# Altium PCB Tigershark 3D R1.5.PcbDoc (part 3 of 4)
Units mil, origin at the board's own origin, x right, y up, seen from the top; angles counter-clockwise.
Board outline 5500 x 4600 mil, 4 copper layers (Top Layer, Groun Plane, Power Plane, Bottom Layer); 333 components, 260 nets, 1066 pads, 887 vias.
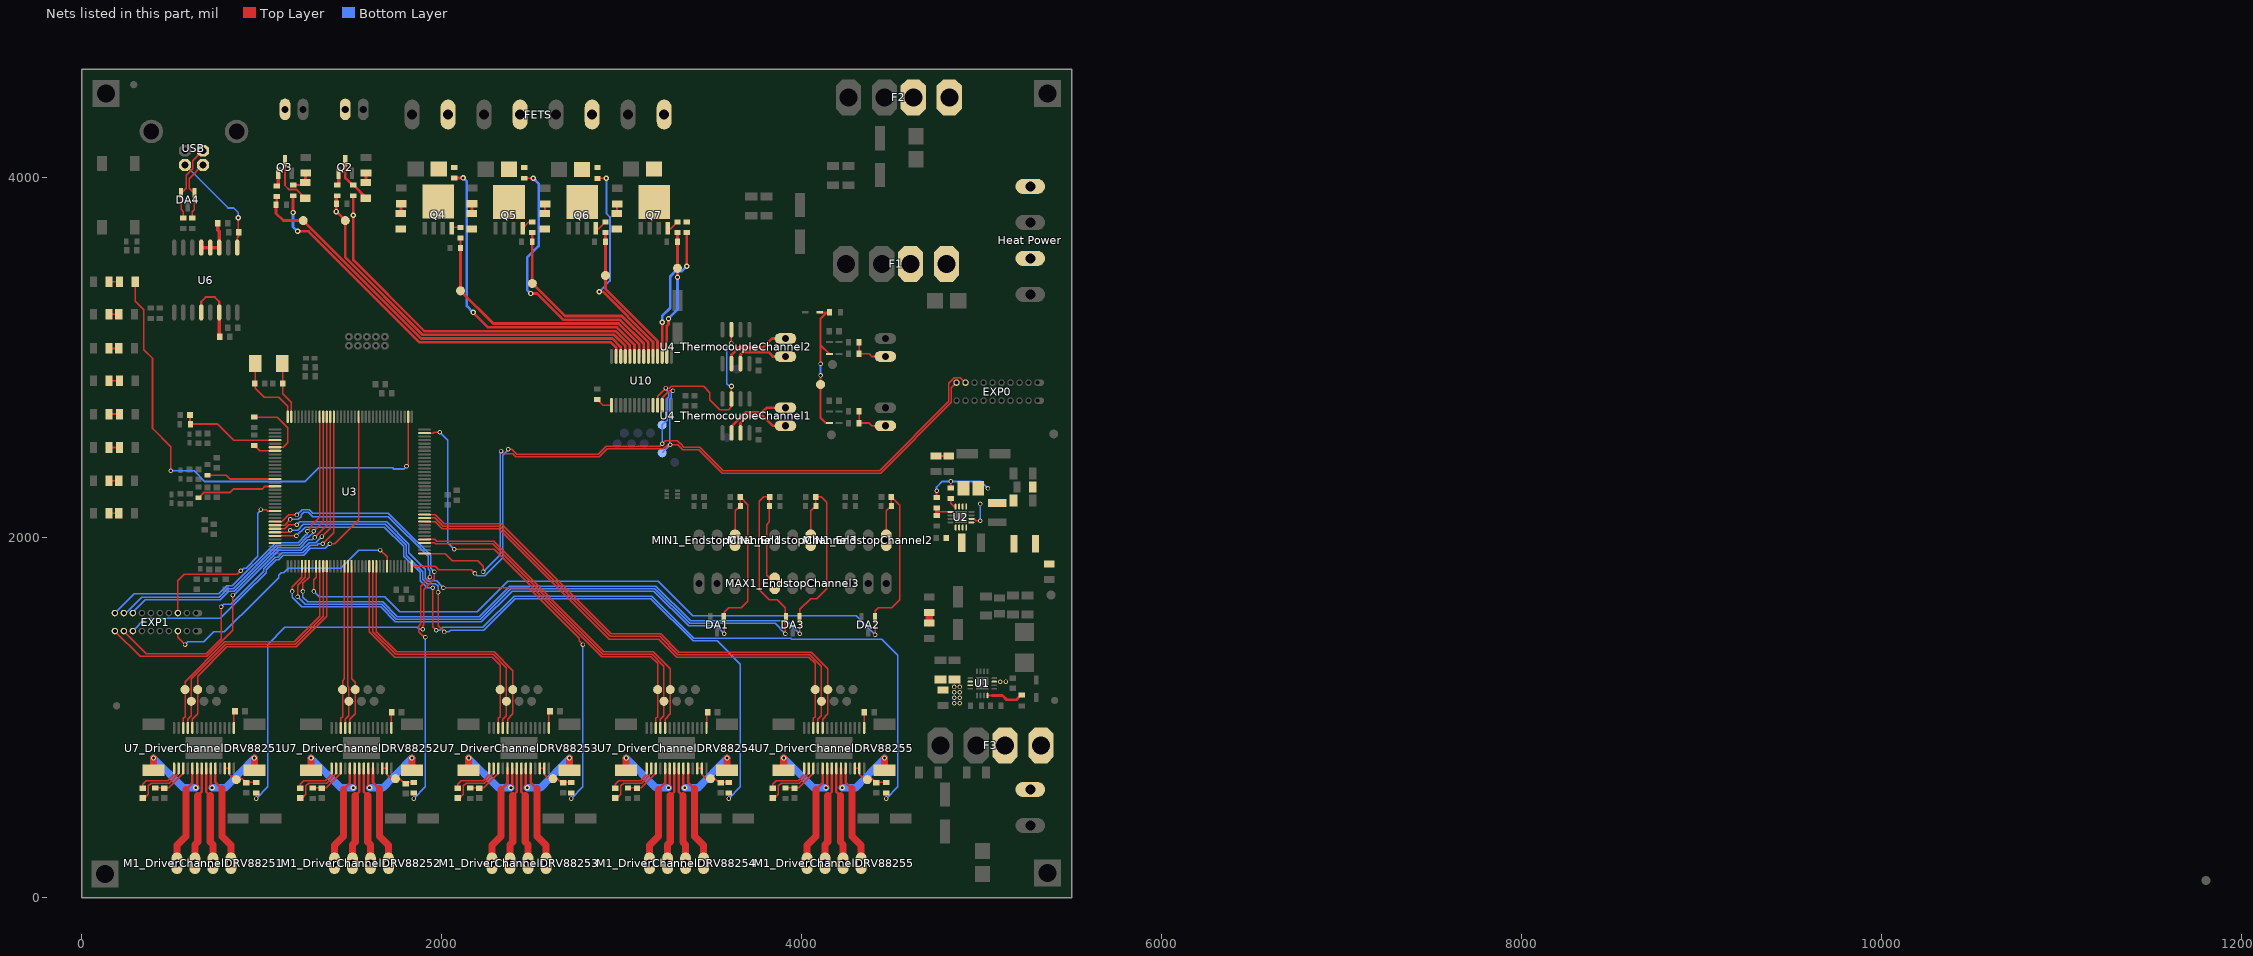
[diagram p5: the nets of this part, all layers, seen from the top]

## Via types
v1: diameter 25, hole 15, Top Layer to Bottom Layer, tented both sides, 435 vias
v2: diameter 30, hole 15, Top Layer to Bottom Layer, tented both sides, 344 vias
v3: diameter 19.68, hole 7.87, Top Layer to Bottom Layer, tented both sides, 75 vias
v4: diameter 50, hole 28, Top Layer to Bottom Layer, tented both sides, 13 vias
v5: diameter 50, hole 20, Top Layer to Bottom Layer, tented both sides, 9 vias
v6: diameter 25, hole 15, Top Layer to Bottom Layer, tented bottom, 8 vias
v7: diameter 30, hole 20, Top Layer to Bottom Layer, tented both sides, 3 vias

## Nets (pads, with @x,y where several pads share a name; then routed paths per layer and width w, separated by ;. In a path a pad name is that pad's centre, name@x,y a point inside that pad or via, vN(x,y) a via of type N, cw(c..) or ccw(c..) an arc to the next point about the centre after c; other vN are vias at no path point) (continued)
MAX_ES3: C2_EndstopChannel3.1 DA3.2 MAX1_EndstopChannel3.1 R3_EndstopChannel3.2 U3.78 | length 4520.1
  Top Layer w8: v1(1200,1670) 1200,1735.4 1243.94,1779.34 U3.78@1243.94,1839.65 ; MAX1_EndstopChannel3.1@3850,1745 3805,1790 3805,2070 3820.94,2085.95 R3_EndstopChannel3.2@3820.94,2175 3820.94,2223.5 C2_EndstopChannel3.1@3822.44,2225 3790,2225 3765,2200 3765,1710 3820,1655 3865,1655 3910,1610 DA3.2@3910,1552.4 ; v1(3910,1465) 3910,1549.8 DA3.2@3912.6,1552.4
  Bottom Layer w8: v1(1200,1670) 1242,1628 1666.6,1628 1749.04,1545.56 2214.75,1545.56 2385.2,1716 3184.6,1716 3377.6,1523 3852,1523 v1(3910,1465)
MIN_ES1: C1_EndstopChannel1.1 DA1.1 MIN1_EndstopChannel1.1 R2_EndstopChannel1.2 U3.77 | length 3940.5
  Top Layer w8: v1(1170,1700) 1170,1725.2 1224.25,1779.45 U3.77@1224.25,1839.65 ; v1(3570,1465) DA1.1@3570,1549.8 ; DA1.1@3570,1552.4 3570,1585 3595,1610 3665,1610 3700,1645 3700,2183.03 C1_EndstopChannel1.1@3658.03,2225 3658.03,2176.97 3630,2148.94 MIN1_EndstopChannel1.1@3630,1985
  Bottom Layer w8: v1(1170,1700) 1170,1668.18 1224.18,1614 1660.8,1614 1743.24,1531.56 2220.55,1531.56 2390.99,1702 3178.8,1702 3371.8,1509 3526,1509 v1(3570,1465)
MIN_ES2: C1_EndstopChannel2.1 DA2.1 MIN1_EndstopChannel2.1 R2_EndstopChannel2.2 U3.81 | length 4640
  Top Layer w8: v1(1290,1700) 1290,1765 1302.99,1777.99 U3.81@1302.99,1839.65 ; v1(4407.4,1460) DA2.1@4407.4,1552.4 4407.4,1592.4 4425,1610 4500,1610 4545,1655 4545,2178.03 C1_EndstopChannel2.1@4498.03,2225 4498.03,2176.97 4470,2148.94 MIN1_EndstopChannel2.1@4470,1985
  Bottom Layer w8: v1(1290,1700) 1320,1670 1683.99,1670 1766.44,1587.56 2197.36,1587.56 2367.8,1758 3202,1758 3395,1565 4302.4,1565 v1(4407.4,1460)
MIN_ES3: C1_EndstopChannel3.1 DA3.1 MIN1_EndstopChannel3.1 R2_EndstopChannel3.2 U3.79 | length 4309.4
  Top Layer w8: v1(1230,1700) 1230,1745.6 1263.62,1779.23 U3.79@1263.62,1839.65 ; v1(3990,1465) 3990,1600 4050,1660 4085,1660 4140,1715 4140,2195 4110,2225 C1_EndstopChannel3.1@4078.03,2225 4078.03,2176.97 4050,2148.94 MIN1_EndstopChannel3.1@4050,1985
  Bottom Layer w8: v1(1230,1700) 1230,1668.18 1256.18,1642 1672.4,1642 1754.84,1559.56 2208.96,1559.56 2379.4,1730 3190.4,1730 3383.4,1537 3918,1537 v1(3990,1465)
MISO: EXP0.19 TP7.1 U3.108 U4_ThermocoupleChannel1.7 U4_ThermocoupleChannel2.7 U10.11 | length 5475.5
  Top Layer w8: U3.108@1834.49,1839.65 1965.35,1839.65 1985,1820 2165,1820 v1(2185,1800) ; v1(2370,2490) 2390.2,2490 2418.2,2462 2870.59,2462 2915.59,2507 3212,2507 3242.5,2537.5 3308.92,2537.5 3335.5,2510.92 3335.5,2510.71 3345.21,2501 3435.21,2501 3565.21,2371 4432.41,2371 4818,2756.59 4818,2857.6 4848.4,2888 4882,2888 EXP0.19@4910,2860 ; U10.11@3199.57,2734.17 3199.57,2784.57 v1(3245,2830) 3265,2830 3275,2840 3455,2840 3490,2805 3490,2764.49 3545,2709.49 3594.49,2709.49 3610,2725 U4_ThermocoupleChannel1.7@3610,2769.49 v2(3610,2840) ; v1(3610,3080) U4_ThermocoupleChannel2.7@3610,3154.49
  Bottom Layer w8: v1(2185,1800) 2197.5,1787.5 2239.32,1787.5 2339,1887.18 2339,2457.18 2370,2488.18 v1(2370,2490) ; v1(3225,2520) TP7.1@3225,2624.8 3252,2651.8 3252,2772.22 3261,2781.22 3261,2807.18 3245,2823.18 v1(3245,2830) ; v2(3610,2840) 3600,2840 3585,2855 3585,3055 v1(3610,3080)
MOD0E1: TP37_DriverChannelDRV88251.1 U3.84 U7_DriverChannelDRV88251.24 | length 1432
  Top Layer w8: U7_DriverChannelDRV88251.24@616.02,942.2 616.02,991.02 645,1020 TP37_DriverChannelDRV88251.1@645,1155 645,1229.2 807.8,1392 1192.8,1392 1362.05,1561.24 U3.84@1362.05,1839.65
MOD0E2: TP37_DriverChannelDRV88252.1 U3.91 U7_DriverChannelDRV88252.24 | length 917.8
  Top Layer w8: U7_DriverChannelDRV88252.24@1491.02,942.2 1491.02,991.02 1520,1020 TP37_DriverChannelDRV88252.1@1520,1155 1520,1195 1499.84,1215.16 U3.91@1499.84,1839.65
MOD0E3: TP37_DriverChannelDRV88253.1 U3.98 U7_DriverChannelDRV88253.24 | length 1540.2
  Top Layer w8: U3.98@1637.64,1839.65 1637.64,1641.96 1638,1641.6 1638,1476.6 1750.6,1364 2291.8,1364 2395,1260.8 TP37_DriverChannelDRV88253.1@2395,1155 2395,1020 2366.02,991.02 U7_DriverChannelDRV88253.24@2366.02,942.2
MOD0E4: TP37_DriverChannelDRV88254.1 U3.113 U7_DriverChannelDRV88254.24 | length 2002.7
  Top Layer w8: U3.113@1905.35,1989.25 1960.75,1989.25 1972.12,1977.88 2289.33,1977.88 2901.21,1366 3174.6,1366 3270,1270.6 TP37_DriverChannelDRV88254.1@3270,1155 3270,1020 3241.02,991.02 U7_DriverChannelDRV88254.24@3241.02,942.2
MOD0E5: TP37_DriverChannelDRV88255.1 U3.120 U7_DriverChannelDRV88255.24 | length 2934.9
  Top Layer w8: U3.120@1905.35,2127.05 1963.56,2127.05 2014.72,2075.88 2329.92,2075.88 2941.8,1464 3216.6,1464 3317.6,1363 4052.8,1363 4145,1270.8 TP37_DriverChannelDRV88255.1@4145,1155 4145,1020 4116.02,991.02 U7_DriverChannelDRV88255.24@4116.02,942.2
MOD1E1: TP36_DriverChannelDRV88251.1 U3.83 U7_DriverChannelDRV88251.25 | length 1434.4
  Top Layer w8: U7_DriverChannelDRV88251.25@590.43,942.2 590.43,990.43 610,1010 TP36_DriverChannelDRV88251.1@610,1090 610,1213.99 802.01,1406 1187.01,1406 1342.36,1561.36 U3.83@1342.36,1839.65
MOD1E2: TP36_DriverChannelDRV88252.1 U3.90 U7_DriverChannelDRV88252.25 | length 907.7
  Top Layer w8: U7_DriverChannelDRV88252.25@1465.43,942.2 1465.43,990.43 1485,1010 TP36_DriverChannelDRV88252.1@1485,1090 1485,1169.5 1480,1174.5 1480,1839.49 U3.90@1480.16,1839.65
MOD1E3: TP36_DriverChannelDRV88253.1 U3.97 U7_DriverChannelDRV88253.25 | length 1529.9
  Top Layer w8: U3.97@1617.95,1839.65 1617.95,1476.85 1744.8,1350 2286.01,1350 2360,1276.01 TP36_DriverChannelDRV88253.1@2360,1090 2360,1010 2340.43,990.43 U7_DriverChannelDRV88253.25@2340.43,942.2
MOD1E4: TP36_DriverChannelDRV88254.1 U3.112 U7_DriverChannelDRV88254.25 | length 1964.6
  Top Layer w8: U3.112@1905.35,1969.57 1960.43,1969.57 1966.12,1963.88 2283.53,1963.88 2895.41,1352 3168.8,1352 3235,1285.8 TP36_DriverChannelDRV88254.1@3235,1090 3235,1010 3215.43,990.43 U7_DriverChannelDRV88254.25@3215.43,942.2
MOD1E5: TP36_DriverChannelDRV88255.1 U3.119 U7_DriverChannelDRV88255.25 | length 2898.4
  Top Layer w8: U3.119@1905.35,2107.36 1907.99,2110 1960.8,2110 2008.92,2061.88 2324.12,2061.88 2936.01,1450 3210.8,1450 3311.8,1349 4046,1349 4110,1285 TP36_DriverChannelDRV88255.1@4110,1090 4110,1010 4090.43,990.43 U7_DriverChannelDRV88255.25@4090.43,942.2
MOD2E1: TP35_DriverChannelDRV88251.1 U3.82 U7_DriverChannelDRV88251.26 | length 1436.9
  Top Layer w8: U7_DriverChannelDRV88251.26@564.84,942.2 564.84,994.84 575,1005 TP35_DriverChannelDRV88251.1@575,1155 575,1198.79 796.21,1420 1181.21,1420 1322.68,1561.47 U3.82@1322.68,1839.65
MOD2E2: TP35_DriverChannelDRV88252.1 U3.89 U7_DriverChannelDRV88252.26 | length 906
  Top Layer w8: U7_DriverChannelDRV88252.26@1439.84,942.2 1439.84,994.84 1450,1005 TP35_DriverChannelDRV88252.1@1450,1155 1450,1205 1460.47,1215.47 U3.89@1460.47,1839.65
MOD2E3: TP35_DriverChannelDRV88253.1 U3.96 U7_DriverChannelDRV88253.26 | length 1519.7
  Top Layer w8: U3.96@1598.27,1839.65 1598.27,1476.73 1739,1336 2280.21,1336 2325,1291.21 TP35_DriverChannelDRV88253.1@2325,1155 2325,1005 2314.84,994.84 U7_DriverChannelDRV88253.26@2314.84,942.2
MOD2E4: TP35_DriverChannelDRV88254.1 U3.143 U7_DriverChannelDRV88254.26 | length 2525.6
  Top Layer w8: U3.143@1905.35,2579.8 1954.8,2579.8 1960,2585 v1(1990,2585) ; v1(2070,1935) 2292.61,1935 2889.61,1338 3163.01,1338 3200,1301.01 TP35_DriverChannelDRV88254.1@3200,1155 3200,1005 3189.84,994.84 U7_DriverChannelDRV88254.26@3189.84,942.2
  Bottom Layer w8: v1(1990,2585) 2035,2540 2035,1970 v1(2070,1935)
MOD2E5: TP35_DriverChannelDRV88255.1 U3.118 U7_DriverChannelDRV88255.26 | length 2858
  Top Layer w8: U3.118@1905.35,2087.68 1963.33,2087.68 2003.12,2047.88 2318.32,2047.88 2930.21,1436 3205.01,1436 3306.01,1335 4040.2,1335 4075,1300.2 TP35_DriverChannelDRV88255.1@4075,1155 4075,1005 4064.84,994.84 U7_DriverChannelDRV88255.26@4064.84,942.2
MODE0_EXP1: EXP1.1 U3.24 | length 2283.5
  Top Layer w8: EXP1.1@185,1480 325,1340 696.41,1340 840,1483.59 v1(840,1680) ; v1(1335,2005) 1381.73,2051.73 U3.24@1381.73,2670.35
  Bottom Layer w8: v1(840,1680) 846.61,1680 878,1711.39 878,1711.95 1096.05,1930 1221.61,1930 1263.61,1972 1302,1972 v1(1335,2005)
MODE0_EXP2: EXP1.20 U3.27 | length 1933.6
  Top Layer w8: v1(1255,2035) 1280,2060 1280,2070 1322.68,2112.68 U3.27@1322.68,2670.35
  Bottom Layer w8: EXP1.20@185,1580 292.44,1687.44 762.44,1687.44 805.5,1730.5 837.16,1730.5 1078.66,1972 1204.21,1972 1246.21,2014 1254,2014 1255,2015 v1(1255,2035)
MODE1_EXP1: EXP1.2 U3.23 | length 2252
  Top Layer w8: EXP1.2@235,1480 360,1355 691.61,1355 775,1438.39 v1(775,1615) ; v1(1340,1965) 1401.42,2026.42 U3.23@1401.42,2670.35
  Bottom Layer w8: v1(775,1615) 790,1630 830,1630 1011,1811 1011,1825.15 1074.85,1889 1089,1889 1116,1916 1227.41,1916 1269.41,1958 1308,1958 1315,1965 v1(1340,1965)
MODE1_EXP2: EXP1.19 U3.26 | length 1903.4
  Top Layer w8: v1(1290,2035) 1342.36,2087.36 U3.26@1342.36,2670.35
  Bottom Layer w8: EXP1.19@235,1580 245.4,1580 334.4,1669 763.8,1669 811.3,1716.5 842.95,1716.5 1084.45,1958 1210.01,1958 1252.01,2000 1260,2000 1290,2030 v1(1290,2035)
MODE2_EXP1: EXP1.3 U3.16 | length 2090.4
  Top Layer w8: v1(1380,1965) 1405.2,1965 1539.21,2099.01 U3.16@1539.21,2670.35
  Bottom Layer w8: EXP1.3@285,1480 355,1550 770,1550 906,1686 906,1686.2 1025,1805.2 1025,1819.35 1080.65,1875 1094.8,1875 1121.8,1902 1233.21,1902 1271.21,1940 1355,1940 v1(1380,1965)
MODE2_EXP2: EXP1.18 U3.25 | length 1885.4
  Top Layer w8: v1(1295,2000) 1362.05,2067.05 U3.25@1362.05,2670.35
  Bottom Layer w8: EXP1.18@285,1580 285,1585 355,1655 769.6,1655 817.1,1702.5 849.31,1702.5 864,1717.19 864,1717.75 1090.25,1944 1215.81,1944 1257.81,1986 1281,1986 v1(1295,2000)
MOSI: EXP0.20 TP8.1 U3.109 U10.12 | length 4481.2
  Top Layer w8: U3.109@1905.35,1910.51 2019.49,1910.51 2060,1870 2200,1870 2230,1840 v1(2230,1810) ; v1(2330,2480) 2345,2465 2395.4,2465 2412.4,2448 2876.39,2448 2920.32,2491.93 3232.34,2491.93 3255.41,2515 v1(3270,2515) 3311.62,2515 3321.5,2505.12 3321.5,2504.91 3339.41,2487 3429.41,2487 3559.41,2357 4438.21,2357 4832,2750.79 4832,2832 EXP0.20@4860,2860 ; U10.12@3225.16,2734.17 3225.16,2775.16 3265,2815 v1(3285,2815)
  Bottom Layer w8: v1(2230,1810) 2325,1905 2325,2480 v1(2330,2480) ; TP8.1@3225,2470 v1(3270,2515) 3266,2519 3266,2766.42 3275,2775.42 3275,2805 v1(3285,2815)
NetC4_1: C4.1 C52.1 FB3.1 L2.2 R12.2 R37.2 U2.14 | length 554.1
  Top Layer w10: R37.2@4749.55,2222.71 v1(4749.55,2259.18) ; R12.2@4828.55,2274.71 v1(4828.55,2311.18) ; U2.14@4942.62,2103.34 4957.51,2103.34 4967.67,2093.18 v1(4991.55,2093.18)
  Bottom Layer w10: v1(4749.55,2259.18) 4749.55,2280.18 4780.55,2311.18 v1(4828.55,2311.18) 4995.55,2311.18 v1(5034.55,2272.18) ; v1(4991.55,2093.18) v1(4991.55,2186.18)
NetC10_2: C10.2 C11.2 R24.1 U1.2 U1.3 U1.11
  other v1: 4848.07,1079.53 4878.07,1079.53 4848.07,1109.53 4878.07,1109.53 4848.07,1139.53 4878.07,1139.53 4848.07,1169.53 4878.07,1169.53 5103.07,1199.37 5133.07,1199.53
NetC22_1: C22.1 F4.1 U2.10 U2.11 U2.12 U2.13
NetC24_2: C24.2 U2.9
NetC43_2: C43.2 U3.36 X2.1 | length 416.3
  Top Layer w8: X2.1@965,2965 965,2830 1015,2780 1095,2780 1145.51,2729.49 U3.36@1145.51,2670.35
NetC44_2: C44.2 U3.35 X2.2 | length 315.6
  Top Layer w8: X2.2@1114.61,2965 1117.56,2962.05 C44.2@1117.56,2855 1117.56,2797.44 1165.2,2749.8 U3.35@1165.2,2670.35
NetC56_2: C56.2 U6.12 U6.14 | length 373.4
  Top Layer w12: U6.12@665,3249.88 665,3310 690,3335 740,3335 765,3310 U6.14@765,3249.88
  Top Layer w22: C56.2@765,3117.44 U6.14@765,3249.88
NetC58_2: C58.2 U6.1 USB.1 | length 599.8
  Top Layer w10: U6.1@865,3610.12 865,3665 872.56,3672.56 C58.2@872.56,3695 ; C58.2@870,3697.56 v2(870,3775)
  Bottom Layer w10: USB.1@575,4069 814,3830 845,3830 870,3805 v2(870,3775)
NetC59_2: C59.2 U6.3 U6.4 U6.5 | length 238
  Top Layer w20: U6.5@665,3610.12 U6.4@715,3610.12 U6.3@765,3610.12 765,3700 757.44,3707.56 C59.2@757.44,3745
NetC66_DriverChannelDRV88251_2: C66_DriverChannelDRV88251.2 R30_DriverChannelDRV88251.2 U7_DriverChannelDRV88251.3 | length 216.1
  Top Layer w8: R30_DriverChannelDRV88251.2@410,609.53 484.53,609.53 564.84,689.84 U7_DriverChannelDRV88251.3@564.84,717.8
NetC66_DriverChannelDRV88252_2: C66_DriverChannelDRV88252.2 R30_DriverChannelDRV88252.2 U7_DriverChannelDRV88252.3 | length 216.1
  Top Layer w8: R30_DriverChannelDRV88252.2@1285,609.53 1359.53,609.53 1439.84,689.84 U7_DriverChannelDRV88252.3@1439.84,717.8
NetC66_DriverChannelDRV88253_2: C66_DriverChannelDRV88253.2 R30_DriverChannelDRV88253.2 U7_DriverChannelDRV88253.3 | length 216.1
  Top Layer w8: R30_DriverChannelDRV88253.2@2160,609.53 2234.53,609.53 2314.84,689.84 U7_DriverChannelDRV88253.3@2314.84,717.8
NetC66_DriverChannelDRV88254_2: C66_DriverChannelDRV88254.2 R30_DriverChannelDRV88254.2 U7_DriverChannelDRV88254.3 | length 216.1
  Top Layer w8: R30_DriverChannelDRV88254.2@3035,609.53 3109.53,609.53 3189.84,689.84 U7_DriverChannelDRV88254.3@3189.84,717.8
NetC66_DriverChannelDRV88255_2: C66_DriverChannelDRV88255.2 R30_DriverChannelDRV88255.2 U7_DriverChannelDRV88255.3 | length 216.1
  Top Layer w8: R30_DriverChannelDRV88255.2@3910,609.53 3984.53,609.53 4064.84,689.84 U7_DriverChannelDRV88255.3@4064.84,717.8
NetC68_DriverChannelDRV88251_1: C68_DriverChannelDRV88251.1 U7_DriverChannelDRV88251.1 | length 256.6
  Top Layer w8: C68_DriverChannelDRV88251.1@350,607.56 340,617.56 340,630 360,650 480,650 513.66,683.66 U7_DriverChannelDRV88251.1@513.66,717.8
NetC68_DriverChannelDRV88251_2: C68_DriverChannelDRV88251.2 U7_DriverChannelDRV88251.2 | length 302.3
  Top Layer w8: C68_DriverChannelDRV88251.2@350,552.44 370,572.44 370,620 386,636 486,636 539.25,689.25 U7_DriverChannelDRV88251.2@539.25,717.8
NetC68_DriverChannelDRV88252_1: C68_DriverChannelDRV88252.1 U7_DriverChannelDRV88252.1 | length 256.6
  Top Layer w8: C68_DriverChannelDRV88252.1@1225,607.56 1215,617.56 1215,630 1235,650 1355,650 1388.66,683.66 U7_DriverChannelDRV88252.1@1388.66,717.8
NetC68_DriverChannelDRV88252_2: C68_DriverChannelDRV88252.2 U7_DriverChannelDRV88252.2 | length 302.3
  Top Layer w8: C68_DriverChannelDRV88252.2@1225,552.44 1245,572.44 1245,620 1261,636 1361,636 1414.25,689.25 U7_DriverChannelDRV88252.2@1414.25,717.8
NetC68_DriverChannelDRV88253_1: C68_DriverChannelDRV88253.1 U7_DriverChannelDRV88253.1 | length 256.6
  Top Layer w8: C68_DriverChannelDRV88253.1@2100,607.56 2090,617.56 2090,630 2110,650 2230,650 2263.66,683.66 U7_DriverChannelDRV88253.1@2263.66,717.8
NetC68_DriverChannelDRV88253_2: C68_DriverChannelDRV88253.2 U7_DriverChannelDRV88253.2 | length 302.3
  Top Layer w8: C68_DriverChannelDRV88253.2@2100,552.44 2120,572.44 2120,620 2136,636 2236,636 2289.25,689.25 U7_DriverChannelDRV88253.2@2289.25,717.8
NetC68_DriverChannelDRV88254_1: C68_DriverChannelDRV88254.1 U7_DriverChannelDRV88254.1 | length 256.6
  Top Layer w8: C68_DriverChannelDRV88254.1@2975,607.56 2965,617.56 2965,630 2985,650 3105,650 3138.66,683.66 U7_DriverChannelDRV88254.1@3138.66,717.8
NetC68_DriverChannelDRV88254_2: C68_DriverChannelDRV88254.2 U7_DriverChannelDRV88254.2 | length 302.3
  Top Layer w8: C68_DriverChannelDRV88254.2@2975,552.44 2995,572.44 2995,620 3011,636 3111,636 3164.25,689.25 U7_DriverChannelDRV88254.2@3164.25,717.8
NetC68_DriverChannelDRV88255_1: C68_DriverChannelDRV88255.1 U7_DriverChannelDRV88255.1 | length 256.6
  Top Layer w8: C68_DriverChannelDRV88255.1@3850,607.56 3840,617.56 3840,630 3860,650 3980,650 4013.66,683.66 U7_DriverChannelDRV88255.1@4013.66,717.8
NetC68_DriverChannelDRV88255_2: C68_DriverChannelDRV88255.2 U7_DriverChannelDRV88255.2 | length 302.3
  Top Layer w8: C68_DriverChannelDRV88255.2@3850,552.44 3870,572.44 3870,620 3886,636 3986,636 4039.25,689.25 U7_DriverChannelDRV88255.2@4039.25,717.8
NetC71_DriverChannelDRV88251_2: C71_DriverChannelDRV88251.2 U7_DriverChannelDRV88251.15 | length 94.4
  Top Layer w8: C71_DriverChannelDRV88251.2@842.44,1035 846.34,1031.1 U7_DriverChannelDRV88251.15@846.34,942.2
NetC71_DriverChannelDRV88252_2: C71_DriverChannelDRV88252.2 U7_DriverChannelDRV88252.15 | length 94.4
  Top Layer w8: C71_DriverChannelDRV88252.2@1717.44,1035 1721.34,1031.1 U7_DriverChannelDRV88252.15@1721.34,942.2
NetC71_DriverChannelDRV88253_2: C71_DriverChannelDRV88253.2 U7_DriverChannelDRV88253.15 | length 94.4
  Top Layer w8: C71_DriverChannelDRV88253.2@2592.44,1035 2596.34,1031.1 U7_DriverChannelDRV88253.15@2596.34,942.2
NetC71_DriverChannelDRV88254_2: C71_DriverChannelDRV88254.2 U7_DriverChannelDRV88254.15 | length 94.4
  Top Layer w8: C71_DriverChannelDRV88254.2@3467.44,1035 3471.34,1031.1 U7_DriverChannelDRV88254.15@3471.34,942.2
NetC71_DriverChannelDRV88255_2: C71_DriverChannelDRV88255.2 U7_DriverChannelDRV88255.15 | length 94.4
  Top Layer w8: C71_DriverChannelDRV88255.2@4342.44,1035 4346.34,1031.1 U7_DriverChannelDRV88255.15@4346.34,942.2
NetC73_2: C73.2 R23.2 U3.40 | length 558.7
  Top Layer w10: C73.2@602.56,2680 602.56,2630.75 754.25,2630.75 844.57,2540.43 U3.40@1074.65,2540.43
NetC75_DriverChannelDRV88251_2: C75_DriverChannelDRV88251.2 R31_DriverChannelDRV88251.1 TP33_DriverChannelDRV88251.1 U7_DriverChannelDRV88251.12 U7_DriverChannelDRV88251.13 | length 226.9
  Top Layer w8: U7_DriverChannelDRV88251.12@795.16,717.8 U7_DriverChannelDRV88251.13@820.75,717.8 820.75,684.25 845,660 892.56,660 913.03,639.53 R31_DriverChannelDRV88251.1@970,639.53
NetC75_DriverChannelDRV88252_2: C75_DriverChannelDRV88252.2 R31_DriverChannelDRV88252.1 TP33_DriverChannelDRV88252.1 U7_DriverChannelDRV88252.12 U7_DriverChannelDRV88252.13 | length 226.9
  Top Layer w8: U7_DriverChannelDRV88252.12@1670.16,717.8 U7_DriverChannelDRV88252.13@1695.75,717.8 1695.75,684.25 1720,660 1767.56,660 1788.03,639.53 R31_DriverChannelDRV88252.1@1845,639.53
NetC75_DriverChannelDRV88253_2: C75_DriverChannelDRV88253.2 R31_DriverChannelDRV88253.1 TP33_DriverChannelDRV88253.1 U7_DriverChannelDRV88253.12 U7_DriverChannelDRV88253.13 | length 226.9
  Top Layer w8: U7_DriverChannelDRV88253.12@2545.16,717.8 U7_DriverChannelDRV88253.13@2570.75,717.8 2570.75,684.25 2595,660 2642.56,660 2663.03,639.53 R31_DriverChannelDRV88253.1@2720,639.53
NetC75_DriverChannelDRV88254_2: C75_DriverChannelDRV88254.2 R31_DriverChannelDRV88254.1 TP33_DriverChannelDRV88254.1 U7_DriverChannelDRV88254.12 U7_DriverChannelDRV88254.13 | length 226.9
  Top Layer w8: U7_DriverChannelDRV88254.12@3420.16,717.8 U7_DriverChannelDRV88254.13@3445.75,717.8 3445.75,684.25 3470,660 3517.56,660 3538.03,639.53 R31_DriverChannelDRV88254.1@3595,639.53
NetC75_DriverChannelDRV88255_2: C75_DriverChannelDRV88255.2 R31_DriverChannelDRV88255.1 TP33_DriverChannelDRV88255.1 U7_DriverChannelDRV88255.12 U7_DriverChannelDRV88255.13 | length 226.9
  Top Layer w8: U7_DriverChannelDRV88255.12@4295.16,717.8 U7_DriverChannelDRV88255.13@4320.75,717.8 4320.75,684.25 4345,660 4392.56,660 4413.03,639.53 R31_DriverChannelDRV88255.1@4470,639.53
NetD2_1: D2.1 R19.1 | length 53.4
  Top Layer w10: D2.1@153.31,3050 R19.1@206.69,3050
NetD3_1: D3.1 R28.1 | length 53.4
  Top Layer w10: D3.1@153.31,3240 R28.1@206.69,3240
NetD7_2: D7.2 R8.1 | length 58.5
  Top Layer w40: D7.2@4709.07,1524.52 R8.1@4709.07,1582.99
NetD9_2: D9.2 R11.1 | length 70.5
  Top Layer w10: D9.2@4746.06,2452.41 4746.13,2452.49 R11.1@4816.55,2452.49
NetD10_1: D10.1 FAN-1.2 Q2.3 R14.2 | length 235.7
  Top Layer w15: Q2.3@1465,4070 1465,3997.15 1505.04,3957.1 R14.2@1510,3957.1 1578.5,3888.6 D10.1@1578.5,3884.19
NetD10_2: D10.2 R13.2 | length 54.1
  Top Layer w15: D10.2@1578.5,3970.8 1580,3972.3 R13.2@1580,4024.27
NetD11_1: D11.1 FAN-2.2 Q3.3 | length 280.8
  Top Layer w10: Q3.3@1130,4093.01 1130,3955.05 1152.73,3932.32 1195.37,3932.32 D11.1@1243.5,3884.19
NetD11_2: D11.2 R47.2 R48.2 | length 128.3
  Top Layer w10: R48.2@1175,3957.1 1229.8,3957.1 D11.2@1243.5,3970.8 ; R47.2@1243.5,4022.77 R47.2@1245,4024.27
  Top Layer w15: D11.2@1243.5,3970.8 R47.2@1243.5,4022.77
NetD12_1: D12.1 D13.1 FETS.2 Q4.5 R57.2
NetD13_2: D13.2 R56.1 | length 54.1
  Top Layer w8: D13.2@1773.5,3799.87 D13.2@1775,3801.36
  Top Layer w15: D13.2@1775,3801.36 R56.1@1775,3853.33
NetD14_1: D14.1 D15.1 FETS.4 Q5.5 R61.2
NetD14_2: D14.2 R60.1 | length 52
  Top Layer w15: D14.2@2169,3801.36 R60.1@2169,3853.33
NetD16_1: D16.1 D17.1 FETS.6 Q6.5 R65.2
NetD16_2: D16.2 R64.1 | length 52
  Top Layer w12: D16.2@2573.5,3799.44 R64.1@2573.5,3851.41
NetD18_1: D18.1 D19.1 FETS.8 Q7.5 R69.2
NetD18_2: D18.2 R68.1 | length 52
  Top Layer w12: D18.2@2975,3800.94 R68.1@2975,3852.91
NetD20_1: D20.1 R29.1 | length 53.4
  Top Layer w10: D20.1@153.31,2135 R29.1@206.69,2135
NetD21_1: D21.1 R34.1 | length 53.4
  Top Layer w10: D21.1@153.31,2315 R34.1@206.69,2315
NetD22_1: D22.1 R35.1 | length 58.4
  Top Layer w10: D22.1@153.31,2500 R35.1@211.69,2500
NetD23_1: D23.1 R36.1 | length 58.4
  Top Layer w10: D23.1@153.31,2685 R36.1@211.69,2685
NetD24_1: D24.1 R39.1 | length 58.4
  Top Layer w10: D24.1@153.31,2870 R39.1@211.69,2870
NetD25_1: D25.1 R40.1 | length 58.4
  Top Layer w8: D25.1@153.31,3420 R40.1@211.69,3420
NetF1_1: "Heat Power.3" F1.1
NetF2_1: "Heat Power.1" F2.1
NetF3_1: "Motor Power.1" F3.1
NetF4_2: F4.2 R25.2
NetL2_1: L2.1 U2.1 U2.2 U2.3
NetM1_DriverChannelDRV88251_1: M1_DriverChannelDRV88251.1 U7_DriverChannelDRV88251.5 | length 563.4
  Top Layer w14: 580,600 616.02,636.02 U7_DriverChannelDRV88251.5@616.02,717.8
  Top Layer w40: M1_DriverChannelDRV88251.1@530,190 530,290 580,340 580,600
NetM1_DriverChannelDRV88251_2: M1_DriverChannelDRV88251.2 U7_DriverChannelDRV88251.7 | length 543.2
  Top Layer w14: 645,565 667.2,587.2 U7_DriverChannelDRV88251.7@667.2,717.8
  Top Layer w40: M1_DriverChannelDRV88251.2@630,190 630,295 645,310 645,565
NetM1_DriverChannelDRV88251_3: M1_DriverChannelDRV88251.3 U7_DriverChannelDRV88251.8 | length 543.2
  Top Layer w14: U7_DriverChannelDRV88251.8@692.8,717.8 692.8,587.2 715,565
  Top Layer w40: 715,565 715,310 730,295 M1_DriverChannelDRV88251.3@730,190
NetM1_DriverChannelDRV88251_4: M1_DriverChannelDRV88251.4 U7_DriverChannelDRV88251.10 | length 563.4
  Top Layer w14: U7_DriverChannelDRV88251.10@743.98,717.8 743.98,640 780,603.98
  Top Layer w40: 780,603.98 780,340 830,290 M1_DriverChannelDRV88251.4@830,190
NetM1_DriverChannelDRV88252_1: M1_DriverChannelDRV88252.1 U7_DriverChannelDRV88252.5 | length 563.4
  Top Layer w14: 1455,600 1491.02,636.02 U7_DriverChannelDRV88252.5@1491.02,717.8
  Top Layer w40: M1_DriverChannelDRV88252.1@1405,190 1405,290 1455,340 1455,600
NetM1_DriverChannelDRV88252_2: M1_DriverChannelDRV88252.2 U7_DriverChannelDRV88252.7 | length 543.2
  Top Layer w14: 1520,565 1542.2,587.2 U7_DriverChannelDRV88252.7@1542.2,717.8
  Top Layer w40: M1_DriverChannelDRV88252.2@1505,190 1505,295 1520,310 1520,565
NetM1_DriverChannelDRV88252_3: M1_DriverChannelDRV88252.3 U7_DriverChannelDRV88252.8 | length 543.2
  Top Layer w14: U7_DriverChannelDRV88252.8@1567.8,717.8 1567.8,587.2 1590,565
  Top Layer w40: 1590,565 1590,310 1605,295 M1_DriverChannelDRV88252.3@1605,190
NetM1_DriverChannelDRV88252_4: M1_DriverChannelDRV88252.4 U7_DriverChannelDRV88252.10 | length 563.4
  Top Layer w14: U7_DriverChannelDRV88252.10@1618.98,717.8 1618.98,640 1655,603.98
  Top Layer w40: 1655,603.98 1655,340 1705,290 M1_DriverChannelDRV88252.4@1705,190
NetM1_DriverChannelDRV88253_1: M1_DriverChannelDRV88253.1 U7_DriverChannelDRV88253.5 | length 563.4
  Top Layer w14: 2330,600 2366.02,636.02 U7_DriverChannelDRV88253.5@2366.02,717.8
  Top Layer w40: M1_DriverChannelDRV88253.1@2280,190 2280,290 2330,340 2330,600
NetM1_DriverChannelDRV88253_2: M1_DriverChannelDRV88253.2 U7_DriverChannelDRV88253.7 | length 543.2
  Top Layer w14: 2395,565 2417.2,587.2 U7_DriverChannelDRV88253.7@2417.2,717.8
  Top Layer w40: M1_DriverChannelDRV88253.2@2380,190 2380,295 2395,310 2395,565
NetM1_DriverChannelDRV88253_3: M1_DriverChannelDRV88253.3 U7_DriverChannelDRV88253.8 | length 543.2
  Top Layer w14: U7_DriverChannelDRV88253.8@2442.8,717.8 2442.8,587.2 2465,565
  Top Layer w40: 2465,565 2465,310 2480,295 M1_DriverChannelDRV88253.3@2480,190
NetM1_DriverChannelDRV88253_4: M1_DriverChannelDRV88253.4 U7_DriverChannelDRV88253.10 | length 563.4
  Top Layer w14: U7_DriverChannelDRV88253.10@2493.98,717.8 2493.98,640 2530,603.98
  Top Layer w40: 2530,603.98 2530,340 2580,290 M1_DriverChannelDRV88253.4@2580,190
NetM1_DriverChannelDRV88254_1: M1_DriverChannelDRV88254.1 U7_DriverChannelDRV88254.5 | length 563.4
  Top Layer w14: 3205,600 3241.02,636.02 U7_DriverChannelDRV88254.5@3241.02,717.8
  Top Layer w40: M1_DriverChannelDRV88254.1@3155,190 3155,290 3205,340 3205,600
NetM1_DriverChannelDRV88254_2: M1_DriverChannelDRV88254.2 U7_DriverChannelDRV88254.7 | length 543.2
  Top Layer w14: 3270,565 3292.2,587.2 U7_DriverChannelDRV88254.7@3292.2,717.8
  Top Layer w40: M1_DriverChannelDRV88254.2@3255,190 3255,295 3270,310 3270,565
NetM1_DriverChannelDRV88254_3: M1_DriverChannelDRV88254.3 U7_DriverChannelDRV88254.8 | length 543.2
  Top Layer w14: U7_DriverChannelDRV88254.8@3317.8,717.8 3317.8,587.2 3340,565
  Top Layer w40: 3340,565 3340,310 3355,295 M1_DriverChannelDRV88254.3@3355,190
NetM1_DriverChannelDRV88254_4: M1_DriverChannelDRV88254.4 U7_DriverChannelDRV88254.10 | length 563.4
  Top Layer w14: U7_DriverChannelDRV88254.10@3368.98,717.8 3368.98,640 3405,603.98
  Top Layer w40: 3405,603.98 3405,340 3455,290 M1_DriverChannelDRV88254.4@3455,190
NetM1_DriverChannelDRV88255_1: M1_DriverChannelDRV88255.1 U7_DriverChannelDRV88255.5 | length 563.4
  Top Layer w14: 4080,600 4116.02,636.02 U7_DriverChannelDRV88255.5@4116.02,717.8
  Top Layer w40: M1_DriverChannelDRV88255.1@4030,190 4030,290 4080,340 4080,600
NetM1_DriverChannelDRV88255_2: M1_DriverChannelDRV88255.2 U7_DriverChannelDRV88255.7 | length 543.2
  Top Layer w14: 4145,565 4167.2,587.2 U7_DriverChannelDRV88255.7@4167.2,717.8
  Top Layer w40: M1_DriverChannelDRV88255.2@4130,190 4130,295 4145,310 4145,565
NetM1_DriverChannelDRV88255_3: M1_DriverChannelDRV88255.3 U7_DriverChannelDRV88255.8 | length 543.2
  Top Layer w14: U7_DriverChannelDRV88255.8@4192.8,717.8 4192.8,587.2 4215,565
  Top Layer w40: 4215,565 4215,310 4230,295 M1_DriverChannelDRV88255.3@4230,190
NetM1_DriverChannelDRV88255_4: M1_DriverChannelDRV88255.4 U7_DriverChannelDRV88255.10 | length 563.4
  Top Layer w14: U7_DriverChannelDRV88255.10@4243.98,717.8 4243.98,640 4280,603.98
  Top Layer w40: 4280,603.98 4280,340 4330,290 M1_DriverChannelDRV88255.4@4330,190
NetP2_ThermistorChannel1_1: P2_ThermistorChannel1.1 R13_ThermistorChannel1.1 R14_ThermistorChannel1.2 | length 216.7
  Top Layer w10: R13_ThermistorChannel1.1@4319.53,2700 R14_ThermistorChannel1.2@4319.53,2635 4375,2635 4390,2620 P2_ThermistorChannel1.1@4465,2620
NetP2_ThermistorChannel2_1: P2_ThermistorChannel2.1 R13_ThermistorChannel2.1 R14_ThermistorChannel2.2 | length 216.7
  Top Layer w10: R13_ThermistorChannel2.1@4319.53,3085 R14_ThermistorChannel2.2@4319.53,3020 4375,3020 4390,3005 P2_ThermistorChannel2.1@4465,3005
NetQ2_1: Q2.1 R45.2 | length 57.4
  Top Layer w20: R45.2@1427.6,3964.7 Q2.1@1427.6,4022.14
NetQ3_1: Q3.1 R52.2 | length 62.4
  Top Layer w20: R52.2@1092.6,3959.7 Q3.1@1092.6,4022.14
NetQ4_4: Q4.4 R58.2 | length 50.5
  Top Layer w10: Q4.4@2056.5,3717.66 2061.36,3722.53 R58.2@2105,3722.53
NetQ5_4: Q5.4 R62.2 | length 68.6
  Top Layer w10: Q5.4@2450,3717.28 2485.25,3752.53 R62.2@2504,3752.53
NetQ6_4: Q6.4 R66.2 | length 68.6
  Top Layer w10: Q6.4@2856,3716.85 2874.75,3716.85 R66.2@2910,3752.1
NetQ7_4: Q7.4 R70.2 | length 68.6
  Top Layer w10: Q7.4@3256,3716.85 3274.75,3716.85 R70.2@3310,3752.1
NetR4_1: R4.1 U3.51 | length 383.6
  Top Layer w10: R4.1@700,2345.47 804.53,2345.47 826.1,2323.9 U3.51@1074.65,2323.9
NetR5_2: R5.2 U3.42 | length 358.7
  Top Layer w8: R5.2@975,2669.06 1085.94,2669.06 1145,2610 1145,2526.77 1119.29,2501.06 U3.42@1074.65,2501.06
NetR6_2: R6.2 U3.53 | length 451.8
  Top Layer w10: R6.2@650,2220.47 650,2221.46 677.73,2249.19 824.19,2249.19 845,2270 1005,2270 1018.34,2283.34 1073.46,2283.34 U3.53@1074.65,2284.53
NetR12_1: R12.1 U2.4 | length 60.4
  Top Layer w10: R12.1@4828.55,2215.65 4828.55,2189.18 4846.48,2171.25 U2.4@4855.02,2171.25
NetR14_1: R14.1 U10.24 | length 2150.9
  Top Layer w14: R14.1@1510,3898.05 1510,3540 1903.5,3146.5 2966.02,3146.5 3046.02,3066.49 U10.24@3046.02,3005.83
  other v2: 1510,3790
NetR17_2: R17.2 U10.1 | length 91.6
  Top Layer w10: R17.2@2865,2765.47 2896.3,2734.17 U10.1@2943.66,2734.17
NetR22_2: R22.2 U3.43 | length 126.7
  Top Layer w10: R22.2@960,2510.47 989.09,2481.38 U3.43@1074.65,2481.38
NetR32_DriverChannelDRV88251_2: R32_DriverChannelDRV88251.2 U7_DriverChannelDRV88251.9 | length 483.3
  Top Layer w14: U7_DriverChannelDRV88251.9@718.39,717.8 718.39,616.61 v2(725,610)
  Top Layer w40: R32_DriverChannelDRV88251.2@960,707.05 v2(960,775)
  Bottom Layer w40: v2(725,610) 800,610 v2(960,775)
NetR32_DriverChannelDRV88252_2: R32_DriverChannelDRV88252.2 U7_DriverChannelDRV88252.9 | length 483.3
  Top Layer w14: U7_DriverChannelDRV88252.9@1593.39,717.8 1593.39,616.61 v2(1600,610)
  Top Layer w40: R32_DriverChannelDRV88252.2@1835,707.05 v2(1835,775)
  Bottom Layer w40: v2(1600,610) 1675,610 v2(1835,775)
NetR32_DriverChannelDRV88253_2: R32_DriverChannelDRV88253.2 U7_DriverChannelDRV88253.9 | length 483.3
  Top Layer w14: U7_DriverChannelDRV88253.9@2468.39,717.8 2468.39,616.61 v2(2475,610)
  Top Layer w40: R32_DriverChannelDRV88253.2@2710,707.05 v2(2710,775)
  Bottom Layer w40: v2(2475,610) 2550,610 v2(2710,775)
NetR32_DriverChannelDRV88254_2: R32_DriverChannelDRV88254.2 U7_DriverChannelDRV88254.9 | length 483.3
  Top Layer w14: U7_DriverChannelDRV88254.9@3343.39,717.8 3343.39,616.61 v2(3350,610)
  Top Layer w40: R32_DriverChannelDRV88254.2@3585,707.05 v2(3585,775)
  Bottom Layer w40: v2(3350,610) 3425,610 v2(3585,775)
NetR32_DriverChannelDRV88255_2: R32_DriverChannelDRV88255.2 U7_DriverChannelDRV88255.9 | length 483.3
  Top Layer w14: U7_DriverChannelDRV88255.9@4218.39,717.8 4218.39,616.61 v2(4225,610)
  Top Layer w40: R32_DriverChannelDRV88255.2@4460,707.05 v2(4460,775)
  Bottom Layer w40: v2(4225,610) 4300,610 v2(4460,775)
NetR33_DriverChannelDRV88251_2: R33_DriverChannelDRV88251.2 U7_DriverChannelDRV88251.6 | length 481.8
  Top Layer w14: v2(635,610) 641.61,616.61 U7_DriverChannelDRV88251.6@641.61,717.8
  Top Layer w40: R33_DriverChannelDRV88251.2@400,707.05 v2(400,775)
  Bottom Layer w40: v2(400,775) 565,610 v2(635,610)
NetR33_DriverChannelDRV88252_2: R33_DriverChannelDRV88252.2 U7_DriverChannelDRV88252.6 | length 481.8
  Top Layer w14: v2(1510,610) 1516.61,616.61 U7_DriverChannelDRV88252.6@1516.61,717.8
  Top Layer w40: R33_DriverChannelDRV88252.2@1275,707.05 v2(1275,775)
  Bottom Layer w40: v2(1275,775) 1440,610 v2(1510,610)
NetR33_DriverChannelDRV88253_2: R33_DriverChannelDRV88253.2 U7_DriverChannelDRV88253.6 | length 481.8
  Top Layer w14: v2(2385,610) 2391.61,616.61 U7_DriverChannelDRV88253.6@2391.61,717.8
  Top Layer w40: R33_DriverChannelDRV88253.2@2150,707.05 v2(2150,775)
  Bottom Layer w40: v2(2150,775) 2315,610 v2(2385,610)
NetR33_DriverChannelDRV88254_2: R33_DriverChannelDRV88254.2 U7_DriverChannelDRV88254.6 | length 481.8
  Top Layer w14: v2(3260,610) 3266.61,616.61 U7_DriverChannelDRV88254.6@3266.61,717.8
  Top Layer w40: R33_DriverChannelDRV88254.2@3025,707.05 v2(3025,775)
  Bottom Layer w40: v2(3025,775) 3190,610 v2(3260,610)
NetR33_DriverChannelDRV88255_2: R33_DriverChannelDRV88255.2 U7_DriverChannelDRV88255.6 | length 481.8
  Top Layer w14: v2(4135,610) 4141.61,616.61 U7_DriverChannelDRV88255.6@4141.61,717.8
  Top Layer w40: R33_DriverChannelDRV88255.2@3900,707.05 v2(3900,775)
  Bottom Layer w40: v2(3900,775) 4065,610 v2(4135,610)
NetR37_1: R37.1 R38.2 U2.5 | length 117.4
  Top Layer w8: 4750.02,2142.71 U2.5@4826.48,2142.71
  Top Layer w20: R38.2@4749.55,2122.71 R37.1@4749.55,2163.65
NetR45_1: R45.1 R46.1 TP41.1 U10.25 | length 2182
  Top Layer w8: R45.1@1415.47,3893.52 R45.1@1420,3898.05
  Top Layer w15: v2(1415,3810) v2@1415.47,3809.53 ; R46.1@1415.47,3852.58 v2@1415.47,3809.53 ; U10.25@3020.43,3005.83 3020.43,3063.09 2957.53,3126 1895.01,3126 1465,3556.01 TP41.1@1465,3760 v2@1415.47,3809.53
  Top Layer w20: R46.1@1415.47,3852.58 R45.1@1415.47,3893.52
NetR48_1: R48.1 U10.27 | length 2293.9
  Top Layer w15: v2(1175,3805) R48.1@1175,3898.05 ; v2(1200,3700) 1261.61,3700 1877.61,3084 2940.13,3084 2969.25,3054.88 U10.27@2969.25,3005.83
  Bottom Layer w15: v2(1175,3805) 1175,3725 v2(1200,3700)
NetR52_1: R52.1 R55.1 TP42.1 U10.26 | length 2369.1
  Top Layer w8: R55.1@1080.47,3847.58 R55.1@1085,3852.1
  Top Layer w15: R55.1@1080.47,3847.58 1080.47,3800.47 1120.95,3760 TP42.1@1231.31,3760 1886.31,3105 2948.83,3105 2994.84,3058.98 U10.26@2994.84,3005.83 ; R55.1@1085,3852.1 R52.1@1085,3893.05
NetR57_1: R57.1 U10.23 | length 1854.7
  Top Layer w15: R57.1@2070,3997.11 v2(2119.11,3997.11) ; v2(2175,3250) 2258,3167 2974.51,3167 3071.61,3069.89 U10.23@3071.61,3005.83
  Bottom Layer w15: v2(2119.11,3997.11) 2140,3976.22 2140,3285 v2(2175,3250)
NetR58_1: R58.1 R59.1 TP48.1 U10.22 | length 1476.5
  Top Layer w10: R59.1@2105,3608 R58.1@2105,3663.47
  Top Layer w15: R59.1@2105,3608 TP48.1@2105,3370 2287,3188 2983.21,3188 3097.2,3074 U10.22@3097.2,3005.83
NetR61_1: R61.1 U10.21 | length 1551.2
  Top Layer w10: R61.1@2460,3995.11 v2(2509.11,3995.11)
  Top Layer w15: v2(2495,3355) 2530,3355 2638,3247 2638.3,3247 2676.3,3209 2991.9,3209 3122.8,3078.11 U10.21@3122.8,3005.83
  Bottom Layer w15: v2(2495,3355) 2475,3375 2475,3555 2539,3619 2539,3965.22 v2(2509.11,3995.11)
NetR62_1: R62.1 R63.1 TP49.1 U10.20 | length 1139.4
  Top Layer w15: R62.1@2504,3693.47 TP49.1@2504,3411 2685,3230 3000.6,3230 3148.39,3082.22 U10.20@3148.39,3005.83
NetR65_1: R65.1 U10.19 | length 1206.8
  Top Layer w10: R65.1@2866,3994.69 v2(2915.11,3994.69)
  Top Layer w15: v2(2875,3365) 2895.3,3365 3173.98,3086.33 U10.19@3173.98,3005.83
  Bottom Layer w10: v2(2875,3365) 2935,3425 2935,3780 2915.11,3799.89 v2(2915.11,3994.69)
NetR66_1: R66.1 R67.1 TP50.1 U10.18 | length 807.2
  Top Layer w15: R66.1@2910,3693.05 2910,3380 3199.57,3090.43 U10.18@3199.57,3005.83
NetR69_1: R69.1 U10.17 | length 763.7
  Top Layer w15: U10.17@3225.16,3005.83 v2@3225.16,3195 ; v2(3361,3506) R69.1@3361,3692.69
  Bottom Layer w15: v2(3225,3195) 3225,3230 3270,3275 3270,3450 3300,3480 3335,3480 v2(3361,3506)
NetR70_1: R70.1 R71.1 TP51.1 U10.16 | length 711.8
  Top Layer w15: U10.16@3250.75,3005.83 3250.75,3175.75 3260,3185 v2(3260,3215) ; v2(3310,3445) R70.1@3310,3693.05
  Bottom Layer w15: v2(3260,3215) 3310,3265 v2(3310,3445)
NetT2_ThermocoupleChannel1_1: T2_ThermocoupleChannel1.1 U4_ThermocoupleChannel1.3 | length 343.7
  Top Layer w15: U4_ThermocoupleChannel1.3@3660,2580.51 3660,2635.55 3698.94,2674.49 3785,2674.49 3839.49,2620 T2_ThermocoupleChannel1.1@3910,2620
NetT2_ThermocoupleChannel1_2: T2_ThermocoupleChannel1.2 U4_ThermocoupleChannel1.2 | length 378.1
  Top Layer w15: U4_ThermocoupleChannel1.2@3610,2580.51 3610,2615.25 3690.24,2695.49 3781,2695.49 3805.51,2720 T2_ThermocoupleChannel1.2@3910,2720
NetT2_ThermocoupleChannel2_1: T2_ThermocoupleChannel2.1 U4_ThermocoupleChannel2.3 | length 316.1
  Top Layer w15: U4_ThermocoupleChannel2.3@3660,2965.51 3660,3015 3675,3030 3814.49,3030 3839.49,3005 T2_ThermocoupleChannel2.1@3910,3005
NetT2_ThermocoupleChannel2_2: T2_ThermocoupleChannel2.2 U4_ThermocoupleChannel2.2 | length 386.5
  Top Layer w15: U4_ThermocoupleChannel2.2@3610,2965.51 3610,3014.49 3650.51,3055 3785,3055 3835,3105 T2_ThermocoupleChannel2.2@3910,3105
NetU10_10: U10.10
NRST: U3.69
OVREF: D1.2 D11_ThermistorChannel1.2 D11_ThermistorChannel2.2 R1.1 TP2.1 | length 769.5
  Top Layer w12: D1.2@4099.37,3250 4140,3250 4105,3215 4105,3068.43 ; v1(4105,2900) 4105,2665 4135,2635 D11_ThermistorChannel1.2@4153.43,2635 ; v1(4105,2965) 4105,3068.43 ; D11_ThermistorChannel2.2@4153.43,3020 4105,3068.43
  Bottom Layer w12: v1(4105,2900) v1(4105,2965)
PG: R9.2 U1.8 | length 214
  Top Layer w10: U1.8@5032.6,1122.6 5058.07,1122.6
  Top Layer w15: 5058.07,1122.6 5115,1122.6 5139.07,1098.53 5192.07,1098.53 5216.14,1122.6 R9.2@5226.61,1122.6
PWR_LED: R40.2 U3.2 | length 2787.2
  Top Layer w10: R40.2@298.31,3420 298.31,3311.69 346,3264 346,3042.56 394,2994.56 394,2606 495,2505 v1(495,2370) ; v1(1805,2395) 1814.8,2404.8 U3.2@1814.8,2670.35
  Bottom Layer w10: v1(495,2370) 625,2370 685,2310 1240,2310 1317.5,2387.5 1727.5,2387.5 1735,2380 1790,2380 v1(1805,2395)
R_N: DA4.1 R18.2 USB.2 | length 341.6
  Top Layer w8: R18.2@615,3775.41 615,3809.09 627.4,3821.49 DA4.1@627.4,3912.4 599,3940.8 599,3993.79 USB.2@674.21,4069
R_P: DA4.2 R20.2 USB.3 | length 428.1
  Top Layer w8: R20.2@565,3775.41 565,3810 552.6,3822.4 DA4.2@552.6,3912.4 581,3940.8 581,4011.36 618,4048.36 618,4091.79 USB.3@674.21,4148
REF1: R31_DriverChannelDRV88251.2 U3.63 | length 3260
  Top Layer w8: v1(970,550) R31_DriverChannelDRV88251.2@970,580.47 ; U3.63@1074.65,2087.68 1112.68,2087.68 1150,2125 v1(1195,2125) ; v1(1895,1490) 1895,1510 1900,1515 1900,1710 1960,1770 v1(1960,1810)
  Bottom Layer w8: v1(970,550) 1035,615 1035,1405 1130,1500 1865,1500 1875,1490 v1(1895,1490) ; v1(1195,2125) 1225,2155 1265,2155 1285,2135 1704.31,2135 1859.96,1979.35 1860.65,1979.35 1940,1900 1940,1830 v1(1960,1810)
REF2: R31_DriverChannelDRV88252.2 U3.64 | length 3226.7
  Top Layer w8: U3.64@1074.65,2067.99 1127.99,2067.99 v1(1160,2100) ; v1(1845,550) R31_DriverChannelDRV88252.2@1845,580.47 ; v1@1907.5,1442.5 1872.5,1477.5 1872.5,1507.3 1885,1519.8 1885,1730 v1(1935,1780)
  Bottom Layer w8: v1(1160,2100) 1205,2100 1220,2115 1220,2125 1235,2140 1260,2140 1285,2115 1704.51,2115 1925,1894.51 1925,1825 1935,1815 v1(1935,1780) ; v1(1845,550) 1910,615 ; 1910,1405 1910,615 ; v1(1910,1445) 1910,615
REF3: R31_DriverChannelDRV88253.2 U3.65 | length 2972.3
  Top Layer w8: U3.65@1074.65,2048.31 1128.11,2048.31 1149.8,2070 v1(1195,2070) ; v1(2010,1720) 2485,1720 2765,1440 2765,1425 v1(2785,1405) ; v1(2720,550) R31_DriverChannelDRV88253.2@2720,580.47
  Bottom Layer w8: v1(1195,2070) 1211,2086 1693.91,2086 1817.96,1961.95 1817.96,1915.22 1910,1823.18 1910,1773.18 1925.68,1757.5 1944.32,1757.5 1945.01,1758.19 1971.81,1758.19 2000,1730 ; v1(2720,550) 2785,615 v1(2785,1405)
REF4: R31_DriverChannelDRV88254.2 U3.66 | length 4066.9
  Top Layer w8: U3.66@1074.65,2028.62 1148.62,2028.62 v1(1160,2040) ; v1(1980,1695) 1980,1510 v1(2015,1475) ; v1(3595,550) R31_DriverChannelDRV88254.2@3595,580.47
  Bottom Layer w8: v1(1160,2040) 1200,2040 1232,2072 1688.11,2072 1803.96,1956.15 1803.96,1901.64 1896,1809.6 1896,1767.38 1919.88,1743.5 1950.12,1743.5 1950.81,1744.19 1965.81,1744.19 1980,1730 v1(1980,1695) ; v1(2015,1475) 2040,1475 2050,1485 2233.39,1485 2408.39,1660 3161.41,1660 3396.41,1425 3530,1425 3660,1295 3660,615 v1(3595,550)
REF5: R31_DriverChannelDRV88255.2 U3.67 | length 4969.7
  Top Layer w8: U3.67@1074.65,2008.94 v1(1193.94,2008.94) ; v1(1950,1720) 1950,1505 v1(1970,1485) ; v1(4470,550) R31_DriverChannelDRV88255.2@4470,580.47
  Bottom Layer w8: v1(1193.94,2008.94) 1243,2058 1682.32,2058 1789.96,1950.36 1789.96,1895.84 1880,1805.8 1880,1760 1920,1720 v1(1950,1720) ; v1(1970,1485) 1990,1485 2005,1500 2228.59,1500 2402.59,1674 3167.21,1674 3401.21,1440 3940.3,1440 3945.3,1435 4445,1435 4535,1345 4535,615 v1(4470,550)
REF_EXP1: EXP1.8 U3.101 | length 1508
  Top Layer w8: EXP1.8@535,1480 535,1445 v1(575,1405) ; v1(1660,1930) 1696.69,1893.31 U3.101@1696.69,1839.65
  Bottom Layer w8: v1(575,1405) 590,1420 680,1420 735,1475 793.99,1475 976,1657.01 976,1657.21 1095,1776.21 1095,1790.36 1109.64,1805 1123.79,1805 1148.79,1830 1440.2,1830 1540.2,1930 v1(1660,1930)
REF_EXP2: EXP1.13 U3.60 | length 1030.2
  Top Layer w8: EXP1.13@535,1580 535,1760 570,1795 865,1795 v1(885,1815) ; v1(995,2155) 1025,2155 1033.27,2146.73 U3.60@1074.65,2146.73
  Bottom Layer w8: v1(885,1815) 900,1830 915,1830 980,1895 980,2135 995,2150 v1(995,2155)